# Altium PCB PoESP_ConnectorBoard.PcbDoc
Units mm, origin at the board's own origin, x right, y up, seen from the top; angles counter-clockwise.
Board outline 50 x 28 mm, 2 copper layers (Top Layer, Bottom Layer); 5 components, 6 nets, 25 pads, 138 vias.
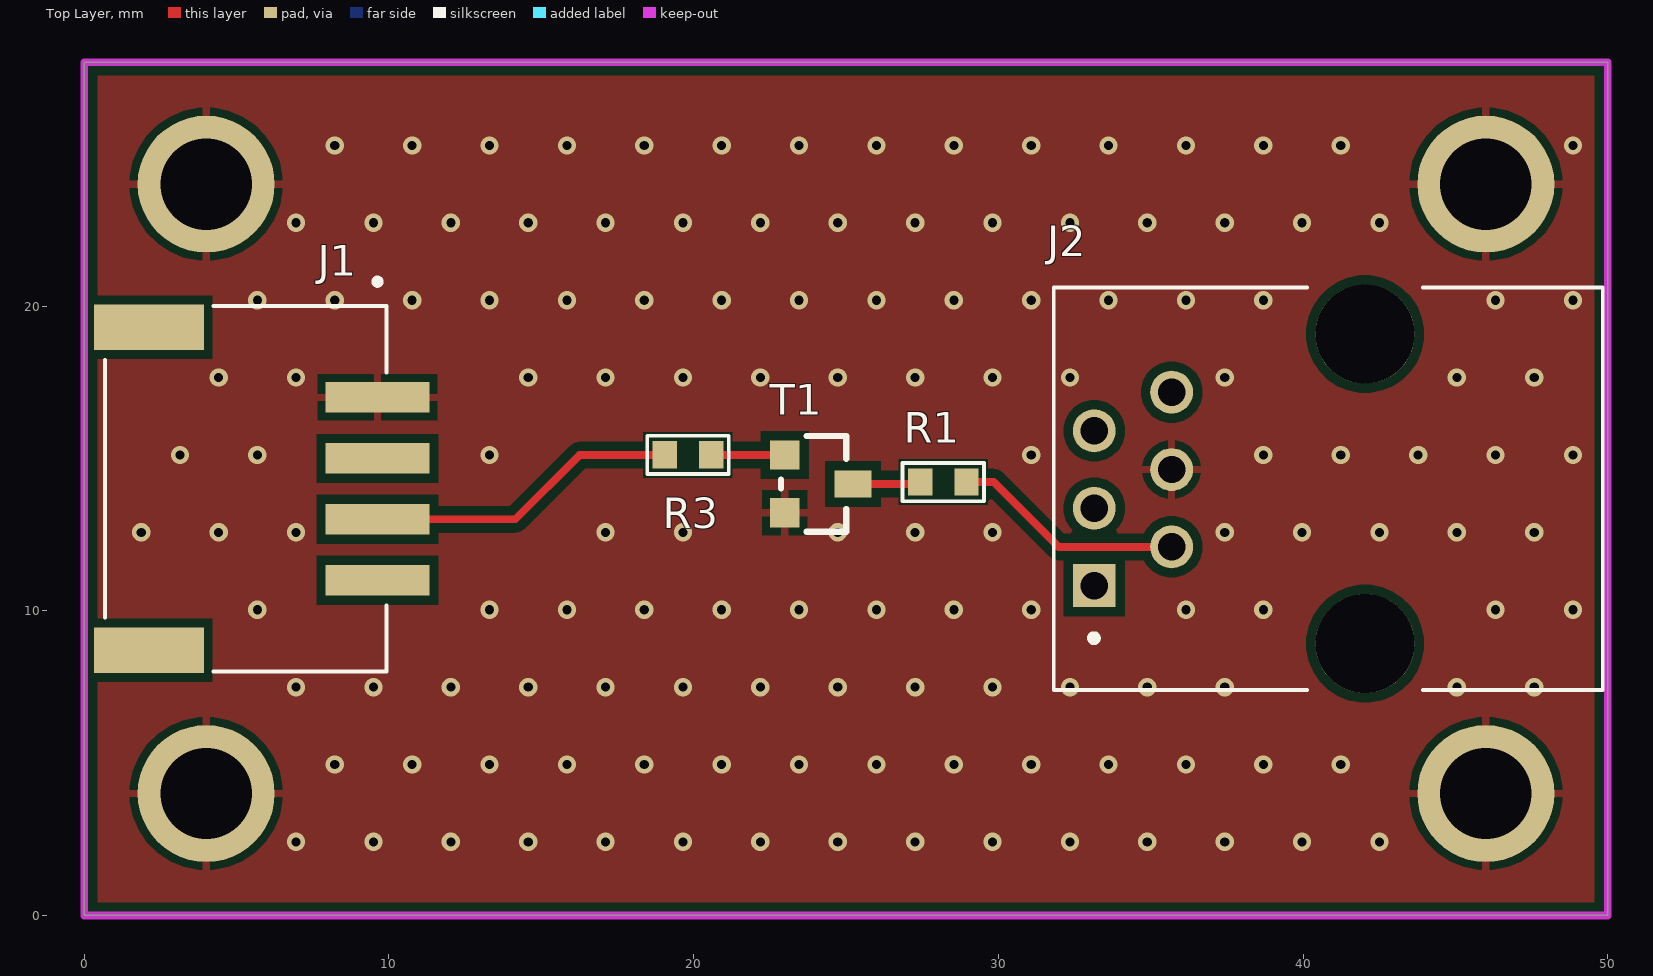
[diagram p0: Top Layer view]
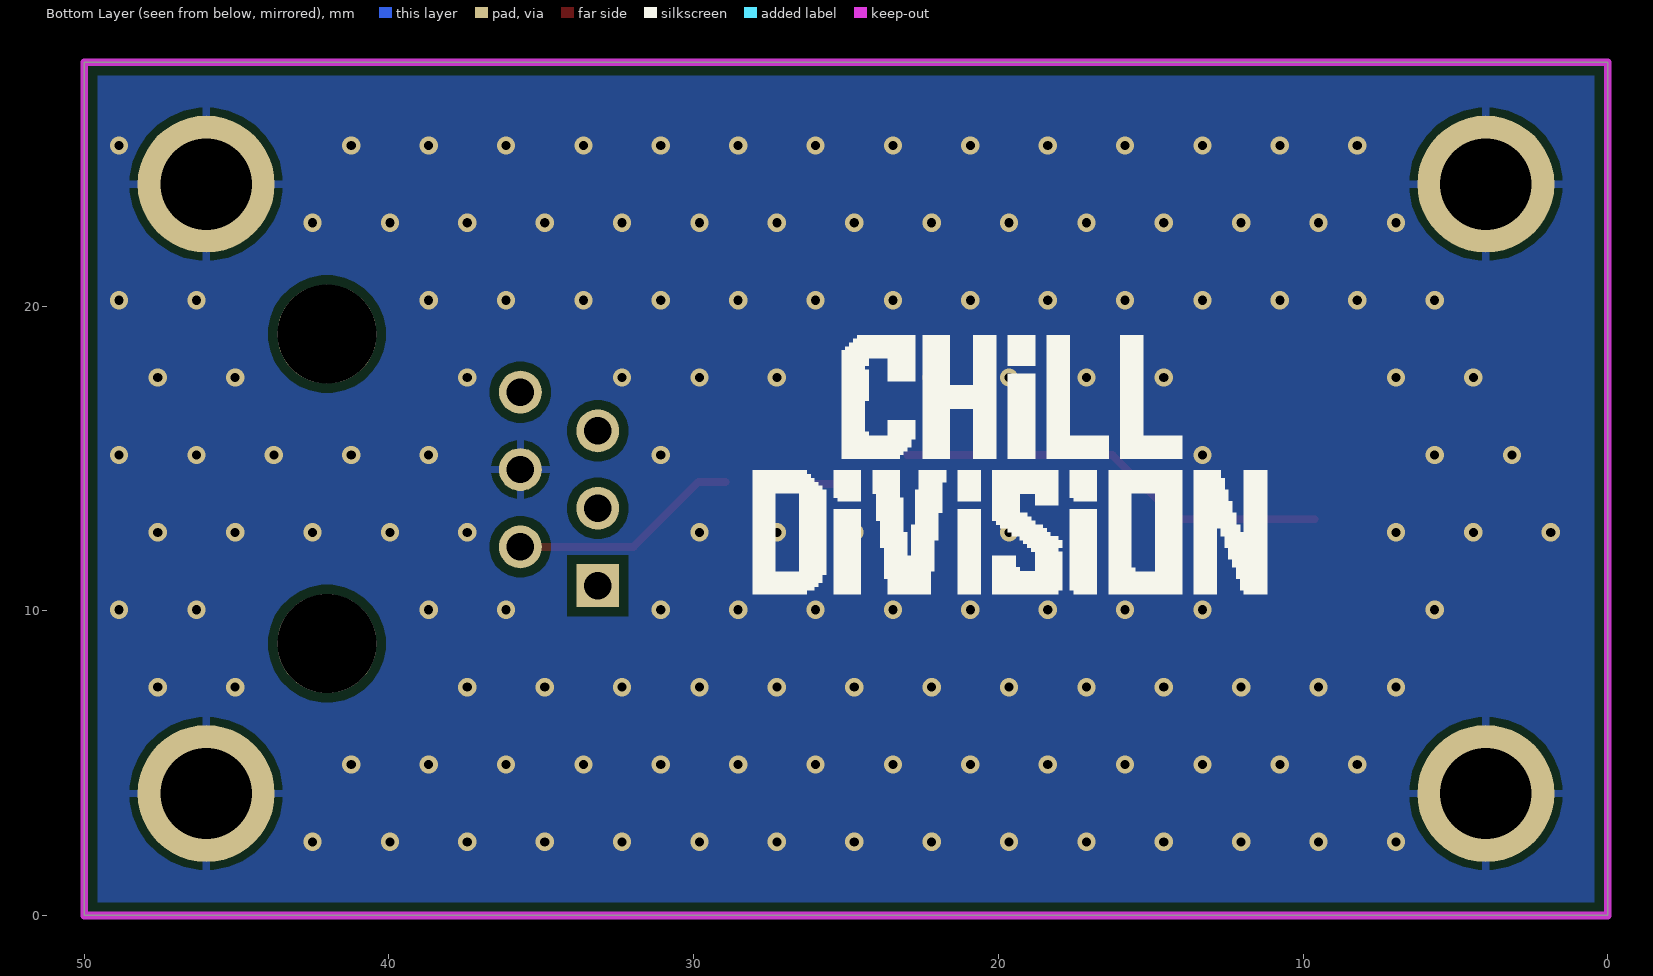
[diagram p1: Bottom Layer view, seen from below]
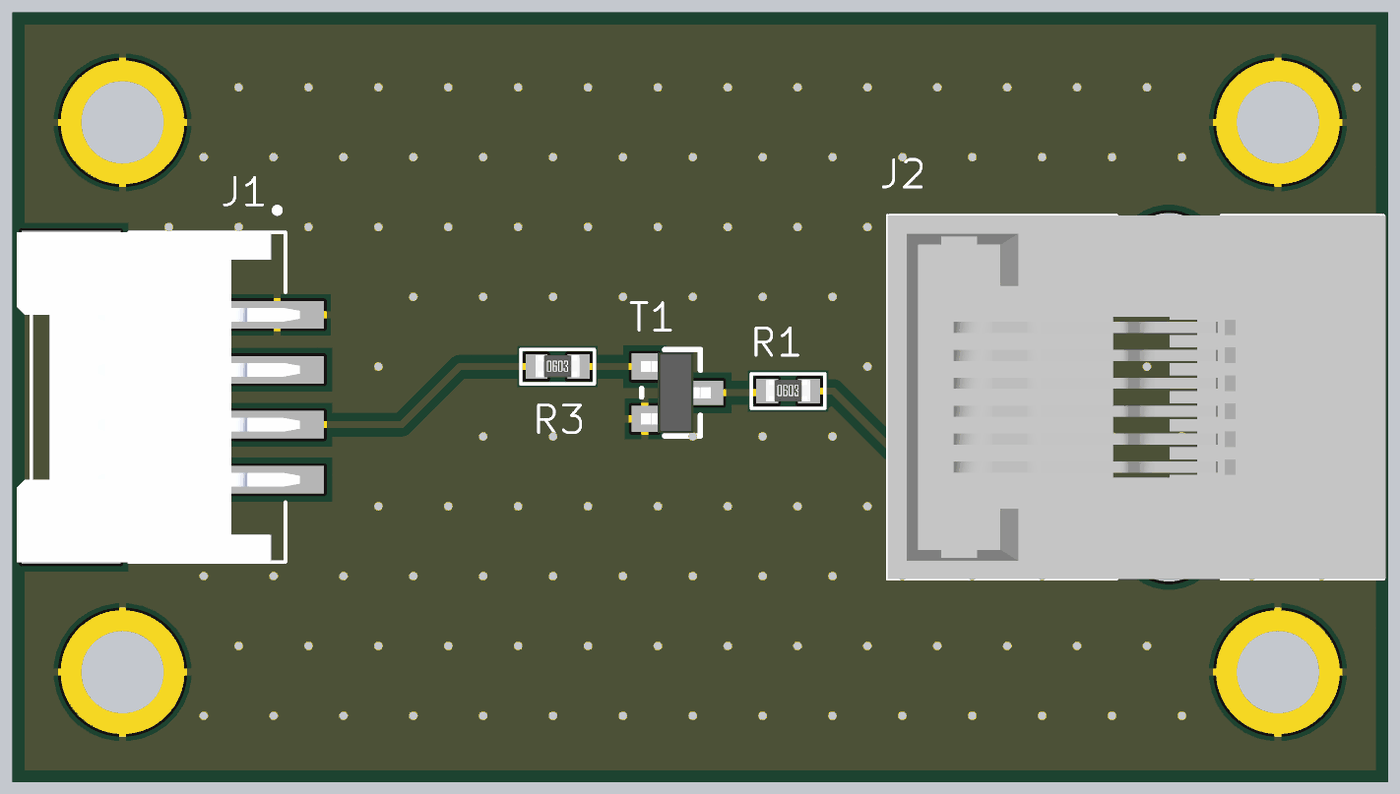
[diagram p2: 3D render of the assembled board from above, using the file's embedded part models]

## Layer stack, top to bottom
Top Solder: solder mask 0.0102, Solder Resist, Dk 3.5
Top Layer: signal copper 0.0356
Dielectric 1: dielectric 0.32, FR-4, Dk 4.8
Bottom Layer: signal copper 0.0356
Bottom Solder: solder mask 0.0102, Solder Resist, Dk 3.5

## Board outline
0,0 50,0 50,28 0,28

## Design rules (kind name [scope] priority, off if disabled: settings)
Clearance Polygon [InPoly] p1: gap=0.3 ignorepadtopadclearanceinfootprint=FALSE
Clearance [All] p2: gap=0.15 ignorepadtopadclearanceinfootprint=FALSE
HoleSize [All] p1: absolutevalues=TRUE maxlimit=5 minlimit=0.025 maxpercent=80.000 minpercent=20.000
PolygonConnect [All] p1: connectstyle=Relief reliefconductorwidth=0.254 reliefentries=4 polygonreliefangle="90 Angle" airgapwidth=0.254
RoutingVias [All] p1: holewidth=0.711 width=1.27 viastyle="Through Hole" minholewidth=0.3 minwidth=0.6 maxholewidth=0.711 maxwidth=1.27
SolderMaskExpansion [All] p1: expansion=0.102 istentingtop=FALSE
Width [All] p1: maxlimit=0.254 minlimit=0.254 preferedwidth=0.254
29 further rules are at their usual default settings.

## Components (designator, comment, footprint, x,y, rotation, side; value= is the part's Value field where it differs from the comment)
J1 "GroveConnector" SEEEDSTUDIO_114020164 5.298,14 r270 top
J2 "0955012661" MOLEX_0955012661 42.037,14 r90 top
R1 "0R" RES-0603 28.194,14.224 r0 top
R3 "1K" RES-0603 19.812,15.113 r0 top
T1 "9013-SOT23" SOT23-3D 22.987,15.113 r270 top value=2SC2712

## Footprints (in the part's own frame and the unit in brackets; to place one, negate y for a bottom-side part, rotate by r counter-clockwise, add the part's x,y. Pads: shape width x height; smd on the part's side, far side on the other; paste and mask are expansions set on the pad)
MOLEX_0955012661 [mm]
  rect 1.408x1.408 hole 0.9: 1(-3.175,8.89)
  round 1.408 hole 0.9: 2(-1.905,6.35) 3(-0.635,8.89) 4(0.635,6.35) 5(1.905,8.89) 6(3.175,6.35)
  round 3.25 hole 3.25 unplated: ""(-5.08,0) ""(5.08,0)
  silkscreen extent -6.61,-7.8 6.61,10.22, body extent -6.61,-7.87 6.61,10.23, height 11.51
RES-0603 [mm]
  rect 0.8x0.9 smd: 1(-0.762,0) 2(0.762,0)
  silkscreen extent -1.34,-0.63 1.34,0.63, body extent -0.8,-0.38 0.8,0.42, height 0.45
SEEEDSTUDIO_114020164 [mm]
  rect 1x3.4 smd: 1(-3,4.325) 2(-1,4.325) 3(1,4.325) 4(3,4.325)
  rect 1.5x3.6 smd: SH1(-5.3,-3.175) SH2(5.3,-3.175)
  silkscreen extent -6.9,-4.62 6,4.62, body extent -6,-5.15 6,5.15, height 5.2
SOT23-3D [mm]
  rect 0.965x0.965 smd: 1(0,0) 2(1.9,0)
  rect 0.889x1.219 smd: 3(0.95,2.24)
  silkscreen extent -0.62,-0.12 2.52,2.02, body extent -0.51,-0.15 2.41,2.39, height 1

## Part data
J1: library part 114020164, "GROVE FEMALE HEADER R/A 20PACK", Package=None, Check_prices=https://www.snapeda.com/parts/114020164/Seeed+Technology+Co.%252C+Ltd/view-part/?ref=eda, MF="Seeed Technology Co., Ltd", MP=114020164, SnapEDA_Link=https://www.snapeda.com/parts/114020164/Seeed+Technology+Co.%252C+Ltd/view-part/?ref=snap
J2: "Jack Modular Connector 6p6c (RJ11, RJ12, RJ14, RJ25) 90Â° Angle (Right) Unshielded Cat3", Package=None, Availability=Unavailable, Check_prices=https://www.snapeda.com/parts/0955012661/Molex/view-part/881426/?ref=eda, MF=Molex, MP=0955012661, Price=None, SnapEDA_Link=https://www.snapeda.com/parts/0955012661/Molex/view-part/881426/?ref=snap
R1 R3: library part RES
T1: library part NPN-SOT23, "NPN Bipolar Transistor", Manufacturer="ON SEMICONDUCTOR", Manufacturer_Part_Number=BSR14, Package=SOT23, ComponentLink1Description=Datasheet, ComponentLink1URL=http://tunmcdsvn.tun.st.com/Component_Datasheet_Library/Trunk/IC/NXP_Transistor_BSR14

## Free pads (board coordinates)
  round 4.5 hole 3: 4(4,24) 5(46,24) 6(46,4) 7(4,4)

## Via types
v1: diameter 0.6, hole 0.3, Top Layer to Bottom Layer, tented both sides, 138 vias

## Nets (pads, with @x,y where several pads share a name; then routed paths per layer and width w, separated by ;. In a path a pad name is that pad's centre, name@x,y a point inside that pad or via, vN(x,y) a via of type N, cw(c..) or ccw(c..) an arc to the next point about the centre after c; other vN are vias at no path point)
5VCC: J1.2
GND: J1.1 J2.4 pad.4 pad.5 pad.6 pad.7 T1.2
  other v1: 6.949,2.413 9.489,2.413 12.029,2.413 14.569,2.413 17.109,2.413 19.649,2.413 22.189,2.413 24.729,2.413 27.269,2.413 29.809,2.413 32.349,2.413 34.889,2.413 37.429,2.413 39.969,2.413 42.509,2.413 8.219,4.953 10.759,4.953 13.299,4.953 15.839,4.953 18.379,4.953 20.919,4.953 23.459,4.953 25.999,4.953 28.539,4.953 31.079,4.953 33.619,4.953 36.159,4.953 38.699,4.953 41.239,4.953 6.949,7.493 9.489,7.493 12.029,7.493 14.569,7.493 17.109,7.493 19.649,7.493 22.189,7.493 24.729,7.493 27.269,7.493 29.809,7.493 32.349,7.493 34.889,7.493 37.429,7.493 45.049,7.493 47.589,7.493 5.679,10.033 13.299,10.033 15.839,10.033 18.379,10.033 20.919,10.033 23.459,10.033 25.999,10.033 28.539,10.033 31.079,10.033 36.159,10.033 38.699,10.033 46.319,10.033 48.859,10.033 1.869,12.573 4.409,12.573 6.949,12.573 17.109,12.573 19.649,12.573 24.729,12.573 27.269,12.573 29.809,12.573 37.429,12.573 39.969,12.573 42.509,12.573 45.049,12.573 47.589,12.573 3.139,15.113 5.679,15.113 13.299,15.113 31.079,15.113 38.699,15.113 41.239,15.113 43.779,15.113 46.319,15.113 48.859,15.113 4.409,17.653 6.949,17.653 14.569,17.653 17.109,17.653 19.649,17.653 22.189,17.653 24.729,17.653 27.269,17.653 29.809,17.653 32.349,17.653 37.429,17.653 45.049,17.653 47.589,17.653 5.679,20.193 8.219,20.193 10.759,20.193 13.299,20.193 15.839,20.193 18.379,20.193 20.919,20.193 23.459,20.193 25.999,20.193 28.539,20.193 31.079,20.193 33.619,20.193 36.159,20.193 38.699,20.193 46.319,20.193 48.859,20.193 6.949,22.733 9.489,22.733 12.029,22.733 14.569,22.733 17.109,22.733 19.649,22.733 22.189,22.733 24.729,22.733 27.269,22.733 29.809,22.733 32.349,22.733 34.889,22.733 37.429,22.733 39.969,22.733 42.509,22.733 8.219,25.273 10.759,25.273 13.299,25.273 15.839,25.273 18.379,25.273 20.919,25.273 23.459,25.273 25.999,25.273 28.539,25.273 31.079,25.273 33.619,25.273 36.159,25.273 38.699,25.273 41.239,25.273 48.859,25.273
NetJ1_3: J1.3 R3.1 | length 10.3
  Top Layer w0.254: J1.3 14.143,13 16.256,15.113 R3.1
NetJ2_2: J2.2 R1.2 | length 7.6
  Top Layer w0.254: R1.2 29.845,14.224 31.974,12.095 J2.2
NetR1_1: R1.1 T1.3 | length 2.2
  Top Layer w0.254: T1.3 27.371,14.163 R1.1
NetR3_2: R3.2 T1.1 | length 2.4
  Top Layer w0.254: R3.2 T1.1
pads on no net: J1.4 J1.SH1 J1.SH2 J2. J2.1 J2.3 J2.5 J2.6

## Polygon pours and split planes (outlines as drawn)
GND on Bottom Layer "GND_L02_P000" (solid, remove dead copper, pour order 0): 0,0 0,28.067 50.038,28.067 50.038,0
GND on Top Layer "GND_L01_P001" (solid, remove dead copper, pour order 1): 0,0 0,28.067 50.038,28.067 50.038,0 -0.127,0

## Keep-outs
Keep-Out Layer:
  the board outline again, w0.254

## Silkscreen, mask and mechanical layers (free items; w line width, h text height)
Bottom Overlay:
  drawing of 17 lines, arcs and shapes, not listed